# Altium PCB BH67F275&62_TEMP_EVM_V1.2.PcbDoc (part 2 of 2)
Units mil, origin at the board's own origin, x right, y up, seen from the top; angles counter-clockwise.
Board outline 4690.02 x 3082.03 mil, 2 copper layers (Top Layer, Bottom Layer); 69 components, 83 nets, 365 pads, 122 vias.
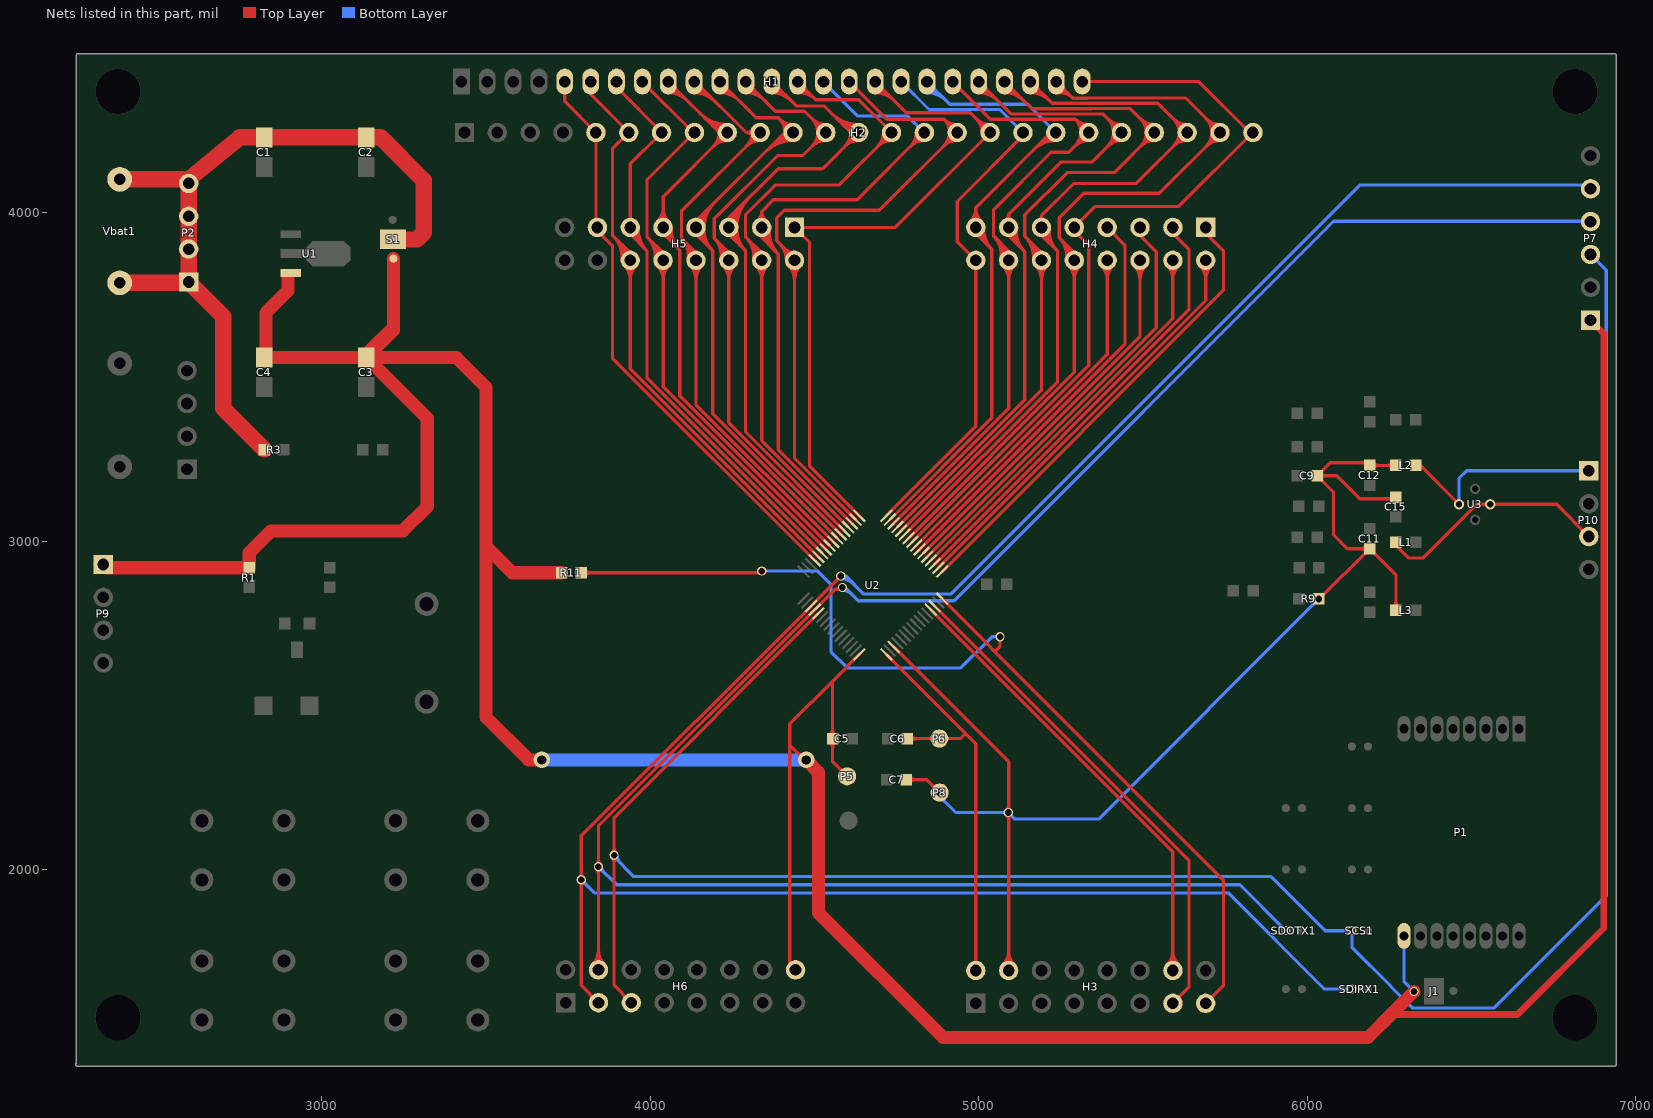
[diagram p2: the nets of this part, all layers, seen from the top]

## Via types
v1: diameter 28, hole 20, Top Layer to Bottom Layer, tented both sides, 64 vias
v2: diameter 28, hole 16, Top Layer to Bottom Layer, tented both sides, 56 vias
v3: diameter 50, hole 28, Top Layer to Bottom Layer, 2 vias

## Nets (pads, with @x,y where several pads share a name; then routed paths per layer and width w, separated by ;. In a path a pad name is that pad's centre, name@x,y a point inside that pad or via, vN(x,y) a via of type N, cw(c..) or ccw(c..) an arc to the next point about the centre after c; other vN are vias at no path point) (continued)
SCSB: H6.5 P7.3 SCS1.1 U2.53 | length 6918.2
  Top Layer w10: v1@3883.64,2038.64 cw(c3868.27,2023.27) 3890,2023.27 cw(c3911.73,2023.27) v1@3896.36,2038.64 ; v1@3883.64,2051.36 ccw(c3868.27,2066.73) 3890,2066.73 ccw(c3911.73,2066.73) v1@3896.36,2051.36 ; H6.5@3942.38,1596 3890,1648.37 v1(3890,2045) 3890,2158.86 U2.53@4512.06,2780.92
  Bottom Layer w10: v1(3890,2045) 3890,2040 3950,1980 5890,1980 6054.67,1815.33 v1(6136.05,1815.33) 6136.05,1765 6255,1646.05 6255,1645 6320,1580 6568.71,1580 6910,1921.29 6910,3826.06 P7.3@6862.36,3873.7 ; v1@3899,2045 ccw(c3932.8,2045) 3908.9,2021.1
"SDI RX": H6.3 P7.5 SDIRX1.1 U2.51 | length 7143.1
  Top Layer w10: v1@3783.64,1963.64 cw(c3768.27,1948.27) 3790,1948.27 cw(c3811.73,1948.27) v1@3796.36,1963.64 ; v1@3783.64,1976.36 ccw(c3768.27,1991.73) 3790,1991.73 ccw(c3811.73,1991.73) v1@3796.36,1976.36 ; H6.3@3842.38,1596 3790,1648.37 v1(3790,1970) 3790,2104.11 U2.51@4489.43,2803.54 ; U2.51@4494.12,2808.23 4579.94,2894.05 v1(4579.94,2895)
  Bottom Layer w10: v1@3790,1961 cw(c3790,1939.27) 3805.36,1954.64 cw(c3820.73,1970) v1@3799,1970 ; v1(3790,1970) 3830,1930 5760,1930 6052.59,1637.41 v1(6136.05,1637.41) ; v1@4579.94,2886 cw(c4579.94,2827.92) 4621.01,2868.99 ; v1(4579.94,2895) 4595,2895 ; v1@4579.94,2896 cw(c4579.94,2862.06) 4603.94,2886.06 ; v1@4587.87,2890.74 cw(c4595,2886.9) 4595,2895 ; v1@4587.87,2899.26 ccw(c4595,2903.1) 4595,2895 ; P7.5@6867.36,4085 6160,4085 4915,2840 4650,2840 4595,2895
"SDO TX": H6.4 P7.4 SDOTX1.1 U2.52 | length 6740
  Top Layer w10: H6.4@3825.03,1713.34 ccw(c3783.16,1755.21) 3842.38,1755.21 ccw(c3901.59,1755.21) H6.4@3859.72,1713.34 ; H6.4@3832.1,1706.27 ccw(c3807.3,1731.07) 3842.38,1731.07 ccw(c3877.45,1731.07) H6.4@3852.65,1706.27 ; v1@3836.01,2003.64 cw(c3820.65,1988.27) 3842.38,1988.27 cw(c3864.1,1988.27) v1@3848.74,2003.64 ; v1@3836.01,2016.36 ccw(c3820.65,2031.73) 3842.38,2031.73 ccw(c3864.1,2031.73) v1@3848.74,2016.36 ; H6.4@3842.38,1696 v1(3842.38,2010) 3842.38,2133.86 U2.52@4500.75,2792.23 4563.52,2855 ; v1@4576.77,2863.63 cw(c4563.52,2869.48) 4563.52,2855 ; v1(4585,2860) 4585,2855 4563.52,2855
  Bottom Layer w10: v1@3842.38,2001 cw(c3842.38,1979.27) 3857.74,1994.64 cw(c3873.1,2010) v1@3851.38,2010 ; v1(3842.38,2010) 3897.38,1955 5795.31,1955 v1(5934.97,1815.33) ; v1@4585,2851 cw(c4585,2810.48) 4613.65,2839.13 ; v1(4585,2860) 4592.78,2860 4632.78,2820 4925,2820 6080,3975 6852.36,3975 P7.4@6867.36,3990
SEG0: H1.5 H2.5 H5.13 U2.45 | length 1766.4
  Top Layer w10: H1.5@3739.96,4400 3739.96,4339.61 H2.5@3834.57,4245 H5.13@3834.57,3960.63 ; H5.13@3839.2,3956 3839.2,3945.8 3885,3900 3885,3557.88 U2.45@4500.75,2942.14
SEG1: H1.6 H2.6 H5.12 U2.44 | length 2122.1
  Top Layer w10: H1.6@3818.7,4400 3818.7,4360.87 H2.6@3934.57,4245 3885,4195.43 3885,3932.82 ; 3901.17,3916.66 cw(c3844.25,3859.74) H5.12@3924.68,3856.57 ; H5.12@3914.69,3856.97 ccw(c3813.14,3860.96) 3885,3932.82 ; 3917.33,3900.49 cw(c3875.35,3858.51) H5.12@3934.67,3856.18 ; H5.12@3921.85,3838.66 cw(c3879.98,3796.79) 3939.2,3796.79 cw(c3998.41,3796.79) H5.12@3956.54,3838.66 ; H5.12@3928.92,3845.73 cw(c3904.12,3820.93) 3939.2,3820.93 cw(c3974.27,3820.93) H5.12@3949.47,3845.73 ; U2.44@4512.06,2953.45 3939.2,3526.31 H5.12@3939.2,3856 3939.2,3878.63 3885,3932.82
SEG2: H1.7 H2.7 H5.11 U2.43 | length 1952.7
  Top Layer w10: H1.7@3897.44,4400 3897.44,4382.13 H2.7@4034.57,4245 3939.2,4149.63 H5.11@3939.2,3956 3939.2,3936 3990,3885.2 ; H5.11@3943.72,3955.73 ccw(c3994.59,3952.68) 3958.55,3916.65 ; H5.11@3953.7,3955.13 ccw(c4024.25,3950.9) 3974.27,3900.92 ; H5.11@3963.68,3954.53 ccw(c4053.92,3949.12) 3990,3885.2 ; U2.43@4523.37,2964.76 3990,3498.14 3990,3885.2
SEG3: H1.8 H2.8 H5.10 U2.42 | length 2107.7
  Top Layer w10: H1.8@3976.18,4400 4131.18,4245 H2.8@4134.57,4245 3990,4100.43 3990,3927.82 ; 4004.93,3912.89 cw(c3956.29,3864.25) H5.10@4024.74,3857.44 ; H5.10@4014.79,3858.43 ccw(c3929.14,3866.96) 3990,3927.82 ; 4019.86,3897.96 cw(c3983.45,3861.55) H5.10@4034.69,3856.45 ; H5.10@4021.85,3838.66 cw(c3979.98,3796.79) 4039.2,3796.79 cw(c4098.41,3796.79) H5.10@4056.54,3838.66 ; H5.10@4028.92,3845.73 cw(c4004.12,3820.93) 4039.2,3820.93 cw(c4074.27,3820.93) H5.10@4049.47,3845.73 ; U2.42@4534.69,2976.08 4039.2,3471.57 H5.10@4039.2,3856 4039.2,3878.63 3990,3927.82
SEG4: H1.9 H2.9 H5.9 U2.41 | length 2684.5
  Top Layer w10: H5.9@4021.85,3973.34 ccw(c3979.98,4015.21) 4039.2,4015.21 ccw(c4098.41,4015.21) H5.9@4056.54,3973.34 ; H5.9@4028.92,3966.27 ccw(c4004.12,3991.07) 4039.2,3991.07 ccw(c4074.27,3991.07) H5.9@4049.47,3966.27 ; H5.9@4039.2,3931.47 cw(c4039.2,3916.19) 4050,3927 ; H5.9@4043.72,3955.79 ccw(c4092.47,3953.55) 4057.96,3919.04 ; H5.9@4053.71,3955.33 ccw(c4123.09,3952.13) 4073.98,3903.02 ; H1.9@4054.92,4365.63 cw(c4054.92,4282.65) 4113.59,4341.33 ; H1.9@4054.92,4375.63 cw(c4054.92,4316.8) 4096.52,4358.4 ; H1.9@4054.92,4385.63 cw(c4054.92,4350.94) 4079.45,4375.47 ; H1.9@4054.92,4400 4209.92,4245 H2.9@4234.57,4245 4039.2,4049.63 H5.9@4039.2,3956 4039.2,3937.8 4090,3887 ; H5.9@4063.7,3954.87 ccw(c4153.72,3950.72) 4090,3887 ; H1.9@4075.51,4386.22 ccw(c4091.95,4386.22) 4080.33,4374.59 ; 4150.62,4304.3 ccw(c4234.57,4388.24) H2.9@4234.57,4269.53 ; 4167.69,4287.23 ccw(c4234.57,4354.1) H2.9@4234.57,4259.53 ; 4184.76,4270.16 ccw(c4234.57,4319.96) H2.9@4234.57,4249.53 ; 4201.84,4253.09 ccw(c4234.57,4285.82) H2.9@4234.57,4239.53 ; H2.9@4210.04,4245 cw(c4150.82,4245) 4192.7,4203.13 cw(c4234.57,4161.26) H2.9@4234.57,4220.47 ; H2.9@4220.04,4245 cw(c4184.97,4245) 4209.77,4220.2 cw(c4234.57,4195.4) H2.9@4234.57,4230.47 ; U2.41@4546,2987.39 4090,3443.39 4090,3887
SEG5: H1.10 H2.10 H5.8 U2.40 | length 2473
  Top Layer w10: 4108.7,3909.13 cw(c4067.68,3868.11) H5.8@4124.87,3858.43 ; H5.8@4115.01,3860.1 ccw(c4044.26,3872.08) 4095,3922.82 ; H5.8@4121.85,3838.66 cw(c4079.98,3796.79) 4139.2,3796.79 cw(c4198.41,3796.79) H5.8@4156.54,3838.66 ; 4122.4,3895.43 cw(c4091.11,3864.14) H5.8@4134.73,3856.76 ; H5.8@4128.92,3845.73 cw(c4104.12,3820.93) 4139.2,3820.93 cw(c4174.27,3820.93) H5.8@4149.47,3845.73 ; H1.10@4133.66,4365.63 cw(c4133.66,4274.88) 4197.83,4339.05 ; H1.10@4133.66,4375.63 cw(c4133.66,4309.02) 4180.76,4356.12 ; H1.10@4133.66,4385.63 cw(c4133.66,4343.16) 4163.69,4373.19 ; H1.10@4133.66,4400 4136.88,4400 4291.88,4245 ; H2.10@4310.04,4245 cw(c4250.82,4245) 4292.7,4203.13 cw(c4334.57,4161.26) H2.10@4334.57,4220.47 ; H2.10@4313.38,4232.65 ccw(c4291.88,4220.12) 4291.88,4245 ; H2.10@4313.38,4257.35 cw(c4291.88,4269.88) 4291.88,4245 ; H2.10@4320.04,4245 cw(c4284.97,4245) 4309.77,4220.2 cw(c4334.57,4195.4) H2.10@4334.57,4230.47 ; U2.40@4557.32,2998.7 4139.2,3416.82 H5.8@4139.2,3856 4139.2,3878.63 4095,3922.82 ; 4095,3922.82 4095,4005.43 H2.10@4334.57,4245 4291.88,4245
SEG6: H1.11 H2.11 H5.7 U2.39 | length 2771.6
  Top Layer w10: H5.7@4139.2,3980.53 ccw(c4139.2,3995.81) 4150,3985 ; H5.7@4143.72,3955.73 ccw(c4194.59,3952.68) 4158.55,3916.65 ; H5.7@4143.72,3956 cw(c4198.59,3956) 4159.79,3994.79 ; H5.7@4153.7,3955.13 ccw(c4224.25,3950.9) 4174.27,3900.92 ; H5.7@4153.72,3956 cw(c4232.73,3956) 4176.86,4011.86 ; H5.7@4163.68,3954.53 ccw(c4253.92,3949.12) 4190,3885.2 ; H5.7@4163.72,3956 cw(c4266.87,3956) 4193.94,4028.94 ; H1.11@4212.4,4365.63 cw(c4212.4,4282.65) 4271.07,4341.33 ; H1.11@4212.4,4375.63 cw(c4212.4,4316.8) 4254,4358.4 ; H1.11@4212.4,4385.63 cw(c4212.4,4350.94) 4236.93,4375.47 ; H1.11@4212.4,4400 4322.4,4290 4389.57,4290 H2.11@4434.57,4245 4410,4245 4139.2,3974.2 H5.7@4139.2,3956 4139.2,3936 4190,3885.2 ; H1.11@4232.99,4386.22 ccw(c4249.43,4386.22) 4237.81,4374.59 ; 4350.76,4185.76 cw(c4434.57,4101.95) H2.11@4434.57,4220.47 ; 4367.83,4202.83 cw(c4434.57,4136.09) H2.11@4434.57,4230.47 ; 4384.9,4219.9 cw(c4434.57,4170.23) H2.11@4434.57,4240.47 ; 4401.97,4236.97 cw(c4434.57,4204.37) H2.11@4434.57,4250.47 ; H2.11@4410.04,4245 ccw(c4350.82,4245) 4392.7,4286.87 ccw(c4434.57,4328.74) H2.11@4434.57,4269.53 ; H2.11@4420.04,4245 ccw(c4384.97,4245) 4409.77,4269.8 ccw(c4434.57,4294.6) H2.11@4434.57,4259.53 ; U2.39@4568.63,3010.02 4190,3388.65 4190,3885.2
SEG7: H1.12 H2.12 H5.6 U2.38 | length 2638.2
  Top Layer w10: 4208.7,3909.13 cw(c4167.68,3868.11) H5.6@4224.87,3858.43 ; H5.6@4215.01,3860.1 ccw(c4144.26,3872.08) 4195,3922.82 ; H5.6@4221.85,3838.66 cw(c4179.98,3796.79) 4239.2,3796.79 cw(c4298.41,3796.79) H5.6@4256.54,3838.66 ; 4222.4,3895.43 cw(c4191.11,3864.14) H5.6@4234.73,3856.76 ; H5.6@4228.92,3845.73 cw(c4204.12,3820.93) 4239.2,3820.93 cw(c4274.27,3820.93) H5.6@4249.47,3845.73 ; H1.12@4291.14,4365.63 cw(c4291.14,4282.65) 4349.81,4341.33 ; H1.12@4291.14,4375.63 cw(c4291.14,4316.8) 4332.74,4358.4 ; H1.12@4291.14,4385.63 cw(c4291.14,4350.94) 4315.67,4375.47 ; H1.12@4291.14,4400 4381.14,4310 4469.57,4310 H2.12@4534.57,4245 4464.57,4175 4387.52,4175 4195,3982.48 4195,3922.82 ; H1.12@4311.73,4386.22 ccw(c4328.17,4386.22) 4316.55,4374.59 ; H2.12@4534.57,4220.47 ccw(c4534.57,4161.26) 4492.7,4203.13 ccw(c4450.82,4245) 4510.04,4245 ccw(c4450.82,4245) 4492.7,4286.87 ccw(c4534.57,4328.74) H2.12@4534.57,4269.53 ; H2.12@4534.57,4230.47 ccw(c4534.57,4195.4) 4509.77,4220.2 ccw(c4484.97,4245) 4520.04,4245 ccw(c4484.97,4245) 4509.77,4269.8 ccw(c4534.57,4294.6) H2.12@4534.57,4259.53 ; U2.38@4579.94,3021.33 4239.2,3362.08 H5.6@4239.2,3856 4239.2,3878.63 4195,3922.82
SEG8: H1.13 H2.13 H5.5 U2.37 | length 2960.5
  Top Layer w10: H5.5@4233.72,3956 cw(c4290.53,3956) 4250.36,3996.16 ; H5.5@4243.72,3955.72 ccw(c4294.81,3952.58) 4258.61,3916.39 ; H5.5@4243.72,3956 cw(c4324.67,3956) 4267.43,4013.23 ; H5.5@4253.7,3955.11 ccw(c4324.38,3950.77) 4274.31,3900.69 ; H5.5@4253.72,3956 cw(c4358.81,3956) 4284.5,4030.31 ; H5.5@4263.68,3954.5 ccw(c4353.95,3948.95) 4290,3885 ; H5.5@4263.72,3956 cw(c4392.95,3956) 4301.57,4047.38 ; H1.13@4369.88,4365.63 cw(c4369.88,4282.65) 4428.55,4341.33 ; H1.13@4369.88,4375.63 cw(c4369.88,4316.8) 4411.48,4358.4 ; H1.13@4369.88,4385.63 cw(c4369.88,4350.94) 4394.41,4375.47 ; H1.13@4369.88,4400 4443.88,4326 4529,4326 4610,4245 H2.13@4634.57,4245 4524.57,4135 4389.2,4135 4239.2,3985 H5.5@4239.2,3956 4239.2,3935.8 4290,3885 ; H1.13@4390.47,4386.22 ccw(c4406.91,4386.22) 4395.29,4374.59 ; 4550.76,4304.24 ccw(c4634.57,4388.05) H2.13@4634.57,4269.53 ; 4567.83,4287.17 ccw(c4634.57,4353.91) H2.13@4634.57,4259.53 ; 4584.9,4270.1 ccw(c4634.57,4319.77) H2.13@4634.57,4249.53 ; U2.37@4591.26,3032.65 4290,3333.9 4290,3885 ; 4601.97,4253.03 ccw(c4634.57,4285.63) H2.13@4634.57,4239.53 ; H2.13@4610.04,4245 cw(c4550.82,4245) 4592.7,4203.13 cw(c4634.57,4161.26) H2.13@4634.57,4220.47 ; H2.13@4620.04,4245 cw(c4584.97,4245) 4609.77,4220.2 cw(c4634.57,4195.4) H2.13@4634.57,4230.47
SEG9: H1.14 H2.14 H5.4 U2.36 | length 2572.4
  Top Layer w10: 4304.93,3912.89 cw(c4256.29,3864.25) H5.4@4324.74,3857.44 ; H5.4@4314.79,3858.43 ccw(c4229.14,3866.96) 4290,3927.82 ; 4319.86,3897.96 cw(c4283.45,3861.55) H5.4@4334.69,3856.45 ; H5.4@4321.85,3838.66 cw(c4279.98,3796.79) 4339.2,3796.79 cw(c4398.41,3796.79) H5.4@4356.54,3838.66 ; H5.4@4328.92,3845.73 cw(c4304.12,3820.93) 4339.2,3820.93 cw(c4374.27,3820.93) H5.4@4349.47,3845.73 ; H1.14@4448.62,4400 4503.62,4345 ; H1.14@4449.19,4375.65 cw(c4451.9,4325) 4487.76,4360.86 ; H1.14@4449.72,4365.66 cw(c4453.51,4294.89) 4503.62,4345 ; H1.14@4469.21,4386.22 ccw(c4485.66,4386.22) 4474.03,4374.59 ; U2.36@4602.57,3043.96 4339.2,3307.33 H5.4@4339.2,3856 4339.2,3878.63 4290,3927.82 ; H2.14@4710.04,4245 cw(c4650.82,4245) 4692.7,4203.13 cw(c4734.57,4161.26) H2.14@4734.57,4220.47 ; H2.14@4720.04,4245 cw(c4684.97,4245) 4709.77,4220.2 cw(c4734.57,4195.4) H2.14@4734.57,4230.47 ; 4290,3927.82 4290,3995 4380,4085 4574.57,4085 H2.14@4734.57,4245 4634.57,4345 4503.62,4345
SEG10: H1.15 H2.15 H5.3 U2.35 | length 2515.4
  Top Layer w10: H5.3@4324.76,3975.83 ccw(c4304.11,4004.2) 4339.2,4004.2 ; H5.3@4333.77,3956.71 ccw(c4379.56,3950.74) 4346.91,3918.09 ; H5.3@4334.17,3931.99 cw(c4332.87,3925.8) 4339.2,3925.8 ; H5.3@4343.69,3955.42 ccw(c4404.97,3947.43) 4361.27,3903.73 ; H5.3@4344.23,3931.99 ccw(c4345.52,3925.8) 4339.2,3925.8 ; H5.3@4353.6,3954.12 ccw(c4430.39,3944.12) 4375.63,3889.37 ; H5.3@4353.63,3975.83 cw(c4374.28,4004.2) 4339.2,4004.2 ; H5.3@4363.52,3952.83 ccw(c4455.8,3940.81) 4390,3875 ; U2.35@4613.88,3055.27 4390,3279.16 4390,3875 ; H2.15@4810.04,4245 cw(c4750.82,4245) 4792.7,4203.13 cw(c4834.57,4161.26) H2.15@4834.57,4220.47 ; H2.15@4820.04,4245 cw(c4784.97,4245) 4809.77,4220.2 cw(c4834.57,4195.4) H2.15@4834.57,4230.47 ; H2.15@4834.57,4245 4629.57,4040 4375,4040 4339.2,4004.2 ; 4339.2,3925.8 H5.3@4339.2,3956 4339.2,4004.2 ; 4339.2,3925.8 4390,3875
  Bottom Layer w10: H1.15@4527.36,4400 4632.36,4295 4784.57,4295 H2.15@4834.57,4245
SEG11: H1.16 H2.16 H5.2 U2.34 | length 2631.7
  Top Layer w10: 4393.93,3906.07 cw(c4343.86,3856) H5.2@4414.67,3856 ; 4405.52,3894.48 ccw(c4439.2,3928.15) H5.2@4439.2,3880.53 ; 4411,3889 cw(c4378,3856) H5.2@4424.67,3856 ; H5.2@4421.85,3838.66 cw(c4379.98,3796.79) 4439.2,3796.79 cw(c4498.41,3796.79) H5.2@4456.54,3838.66 ; H5.2@4428.92,3845.73 cw(c4404.12,3820.93) 4439.2,3820.93 cw(c4474.27,3820.93) H5.2@4449.47,3845.73 ; H1.16@4606.1,4400 4720.57,4285.53 4851.35,4285.53 4851.88,4285 4894.57,4285 ; U2.34@4625.2,3066.59 4439.2,3252.59 H5.2@4439.2,3856 4439.2,3860.8 4385,3915 4385,3985 4407.92,4007.92 4697.49,4007.92 H2.16@4934.57,4245 4894.57,4285 ; H2.16@4910.04,4245 cw(c4850.82,4245) 4892.7,4203.13 cw(c4934.57,4161.26) H2.16@4934.57,4220.47 ; H2.16@4910.05,4245.81 ccw(c4857.12,4247.55) 4894.57,4285 ; H2.16@4920.04,4245 cw(c4884.97,4245) 4909.77,4220.2 cw(c4934.57,4195.4) H2.16@4934.57,4230.47 ; H2.16@4920.05,4245.48 ccw(c4888.69,4246.51) 4910.88,4268.69 ccw(c4933.06,4290.87) H2.16@4934.09,4259.52 ; H2.16@4933.76,4269.51 cw(c4932.02,4322.45) 4894.57,4285
SEG12: H1.17 H2.17 H5.1 U2.33 | length 2388.5
  Top Layer w10: U2.33@4636.51,3077.9 4485,3229.41 4485,3910.2 H5.1@4439.2,3956 4745.57,3956 H2.17@5034.57,4245 4974.57,4305 4779.84,4305 H1.17@4684.84,4400 ; H1.17@4684.84,4365.63 cw(c4684.84,4282.65) 4743.52,4341.33 ; H1.17@4684.84,4375.63 cw(c4684.84,4316.8) 4726.44,4358.4 ; H1.17@4684.84,4385.63 cw(c4684.84,4350.94) 4709.37,4375.47 ; H1.17@4705.43,4386.22 ccw(c4721.88,4386.22) 4710.25,4374.59 ; H2.17@5010.04,4245 ccw(c4950.82,4245) 4992.7,4286.87 ccw(c5034.57,4328.74) H2.17@5034.57,4269.53 ; H2.17@5020.04,4245 ccw(c4984.97,4245) 5009.77,4269.8 ccw(c5034.57,4294.6) H2.17@5034.57,4259.53
SEG13: H1.18 H2.18 H4.16 U2.32 | length 1821
  Top Layer w10: U2.32@4718.54,3077.9 4991,3350.36 H4.16@4991,3856 4935,3912 4935,4035 5134.57,4234.57 H2.18@5134.57,4245
  Bottom Layer w10: H1.18@4763.58,4400 4848.58,4315 5064.57,4315 H2.18@5134.57,4245
SEG14: H1.19 H2.19 H4.15 U2.31 | length 2556.6
  Top Layer w10: U2.31@4729.85,3066.59 5040,3376.74 5040,3890 ; H4.15@4973.66,3973.34 ccw(c4931.79,4015.21) 4991,4015.21 ccw(c5050.21,4015.21) H4.15@5008.34,3973.34 ; H4.15@4980.73,3966.27 ccw(c4955.93,3991.07) 4991,3991.07 ccw(c5026.07,3991.07) H4.15@5001.27,3966.27 ; H4.15@4991,3931.47 cw(c4991,3913.3) 5003.85,3926.15 ; H4.15@4995.52,3955.73 ccw(c5040.14,3953.08) 5008.53,3921.47 ; H4.15@5005.5,3955.14 ccw(c5069.84,3951.31) 5024.26,3905.74 ; H4.15@5015.48,3954.54 ccw(c5099.53,3949.54) 5040,3890 ; 5167.09,4192.52 cw(c5234.57,4125.04) H2.19@5234.57,4220.47 ; 5184.16,4209.59 cw(c5234.57,4159.19) H2.19@5234.57,4230.47 ; 5201.23,4226.66 cw(c5234.57,4193.33) H2.19@5234.57,4240.47 ; 5203.3,4228.74 ccw(c5187.04,4245) H2.19@5210.04,4245 ; H2.19@5234.57,4245 5219.57,4245 4991,4016.43 H4.15@4991,3956 4991,3939 5040,3890
  Bottom Layer w10: H1.19@4842.32,4365.63 cw(c4842.32,4282.65) 4901,4341.33 ; H1.19@4842.32,4375.63 cw(c4842.32,4316.8) 4883.92,4358.4 ; H1.19@4842.32,4385.63 cw(c4842.32,4350.94) 4866.85,4375.47 ; H1.19@4842.32,4400 4911.32,4331 5148.57,4331 H2.19@5234.57,4245 ; H1.19@4862.91,4386.22 ccw(c4879.36,4386.22) 4867.73,4374.59
SEG15: H1.20 H2.20 H4.14 U2.30 | length 2647.6
  Top Layer w10: U2.30@4741.16,3055.27 5091,3405.11 H4.14@5091,3856 5091,3884 5045,3930 ; H1.20@4921.06,4400 5035.43,4285.63 5293.94,4285.63 ; 5058.54,3916.46 cw(c5012.21,3870.13) H4.14@5076.7,3858.56 ; H4.14@5066.86,3860.33 ccw(c4989.25,3874.25) 5045,3930 ; 5072.07,3902.93 cw(c5035.16,3866.01) H4.14@5086.54,3856.8 ; H4.14@5073.66,3838.66 cw(c5031.79,3796.79) 5091,3796.79 cw(c5150.21,3796.79) H4.14@5108.34,3838.66 ; H4.14@5080.73,3845.73 cw(c5055.93,3820.93) 5091,3820.93 cw(c5126.07,3820.93) H4.14@5101.27,3845.73 ; 5085.61,3889.39 cw(c5058.11,3861.9) H4.14@5096.39,3855.03 ; H2.20@5310.04,4245 cw(c5250.82,4245) 5292.7,4203.13 cw(c5334.57,4161.26) H2.20@5334.57,4220.47 ; H2.20@5310.05,4245.53 ccw(c5255.02,4246.71) 5293.94,4285.63 ; H2.20@5320.04,4245 cw(c5284.97,4245) 5309.77,4220.2 cw(c5334.57,4195.4) H2.20@5334.57,4230.47 ; H2.20@5320.04,4245.31 ccw(c5287.45,4246.01) 5310.5,4269.06 ccw(c5333.55,4292.11) H2.20@5334.25,4259.52 ; H2.20@5334.04,4269.52 cw(c5332.85,4324.54) 5293.94,4285.63 ; 5045,3930 5045,4010 5220,4185 5274.57,4185 H2.20@5334.57,4245 5293.94,4285.63
SEG16: H1.21 H2.21 H4.13 U2.29 | length 2794.6
  Top Layer w10: U2.29@4752.48,3043.96 5140,3431.48 5140,3882 ; H1.21@4999.8,4365.63 cw(c4999.8,4282.65) 5058.48,4341.33 ; H1.21@4999.8,4375.63 cw(c4999.8,4316.8) 5041.4,4358.4 ; H1.21@4999.8,4385.63 cw(c4999.8,4350.94) 5024.33,4375.47 ; H1.21@4999.8,4400 5098.17,4301.63 5377.94,4301.63 H2.21@5434.57,4245 5344.57,4155 5250,4155 5091,3996 ; H1.21@5020.39,4386.22 ccw(c5036.84,4386.22) 5025.21,4374.59 ; H4.13@5079.88,3977.86 ccw(c5070.65,3996) 5091,3996 ; H4.13@5085.57,3956.65 ccw(c5122.79,3952.22) 5096.28,3925.72 ; H4.13@5095.5,3955.47 ccw(c5148.84,3949.13) 5110.86,3911.14 ; H4.13@5102.12,3977.86 cw(c5111.35,3996) 5091,3996 ; H4.13@5105.43,3954.29 ccw(c5174.89,3946.04) 5125.43,3896.57 ; H4.13@5115.36,3953.11 ccw(c5200.94,3942.94) 5140,3882 ; H2.21@5434.57,4220.47 ccw(c5434.57,4161.26) 5392.7,4203.13 ccw(c5350.82,4245) 5410.04,4245 ccw(c5350.82,4245) 5392.7,4286.87 ccw(c5434.57,4328.74) H2.21@5434.57,4269.53 ; H2.21@5434.57,4230.47 ccw(c5434.57,4195.4) 5409.77,4220.2 ccw(c5384.97,4245) 5420.04,4245 ccw(c5384.97,4245) 5409.77,4269.8 ccw(c5434.57,4294.6) H2.21@5434.57,4259.53 ; 5091,3996 H4.13@5091,3956 5091,3931 5140,3882
SEG17: H1.22 H2.22 H4.12 U2.28 | length 2962.9
  Top Layer w10: U2.28@4763.79,3032.65 5191,3459.85 H4.12@5191,3856 5191,3878.63 5140,3929.63 5140,3993.98 5269.02,4123 5412.57,4123 H2.22@5534.57,4245 5461.57,4318 5343.54,4318 5343.17,4317.63 5160.91,4317.63 H1.22@5078.54,4400 ; H1.22@5078.54,4365.63 cw(c5078.54,4282.65) 5137.22,4341.33 ; H1.22@5078.54,4375.63 cw(c5078.54,4316.8) 5120.14,4358.4 ; H1.22@5078.54,4385.63 cw(c5078.54,4350.94) 5103.07,4375.47 ; H1.22@5099.13,4386.22 ccw(c5115.58,4386.22) 5103.95,4374.59 ; 5140,3929.62 cw(c5075.27,3864.9) H4.12@5166.54,3857.88 ; 5155.38,3914.25 cw(c5103.83,3862.7) H4.12@5176.52,3857.11 ; 5170.75,3898.87 cw(c5132.38,3860.51) H4.12@5186.49,3856.35 ; H4.12@5173.66,3838.66 cw(c5131.79,3796.79) 5191,3796.79 cw(c5250.21,3796.79) H4.12@5208.34,3838.66 ; H4.12@5180.73,3845.73 cw(c5155.93,3820.93) 5191,3820.93 cw(c5226.07,3820.93) H4.12@5201.27,3845.73 ; H2.22@5534.57,4220.47 ccw(c5534.57,4161.26) 5492.7,4203.13 ccw(c5450.82,4245) 5510.04,4245 ccw(c5450.82,4245) 5492.7,4286.87 ccw(c5534.57,4328.74) H2.22@5534.57,4269.53 ; H2.22@5534.57,4230.47 ccw(c5534.57,4195.4) 5509.77,4220.2 ccw(c5484.97,4245) 5520.04,4245 ccw(c5484.97,4245) 5509.77,4269.8 ccw(c5534.57,4294.6) H2.22@5534.57,4259.53
SEG18: H1.23 H2.23 H4.11 U2.27 | length 2923
  Top Layer w10: U2.27@4784.39,3030.61 5240,3486.23 5240,3883.65 ; H1.23@5157.28,4365.63 cw(c5157.28,4282.65) 5215.96,4341.33 ; H1.23@5157.28,4375.63 cw(c5157.28,4316.8) 5198.88,4358.4 ; H1.23@5157.28,4385.63 cw(c5157.28,4350.94) 5181.81,4375.47 ; H1.23@5157.28,4400 5223.65,4333.63 5336.55,4333.63 5336.92,4334 5545.57,4334 H2.23@5634.57,4245 5479.57,4090 5290,4090 5191,3991 ; H1.23@5177.87,4386.22 ccw(c5194.32,4386.22) 5182.69,4374.59 ; H4.11@5182.63,3979.06 ccw(c5178.29,3991) 5191,3991 ; H4.11@5195.5,3955.52 ccw(c5247.18,3949.98) 5210.43,3913.22 ; H4.11@5199.37,3979.06 cw(c5203.71,3991) 5191,3991 ; H4.11@5205.44,3954.45 ccw(c5273.88,3947.11) 5225.21,3898.44 ; H4.11@5215.39,3953.38 ccw(c5300.59,3944.25) 5240,3883.66 ; H2.23@5634.57,4220.47 ccw(c5634.57,4161.26) 5592.7,4203.13 ccw(c5550.82,4245) 5610.04,4245 ccw(c5550.82,4245) 5592.7,4286.87 ccw(c5634.57,4328.74) H2.23@5634.57,4269.53 ; H2.23@5634.57,4230.47 ccw(c5634.57,4195.4) 5609.77,4220.2 ccw(c5584.97,4245) 5620.04,4245 ccw(c5584.97,4245) 5609.77,4269.8 ccw(c5634.57,4294.6) H2.23@5634.57,4259.53 ; 5191,3991 H4.11@5191,3956 5191,3932.65 5240,3883.65
SEG19: H1.24 H2.24 H4.10 U2.26 | length 3083.7
  Top Layer w10: U2.26@4786.42,3010.02 5291,3514.6 H4.10@5291,3856 5291,3879 5245,3925 ; H1.24@5236.02,4400 5286.39,4349.63 ; H1.24@5237.41,4375.72 cw(c5242.82,4334.73) 5272.06,4363.97 ; H1.24@5238.72,4365.81 cw(c5246.16,4309.4) 5286.39,4349.63 ; H1.24@5256.61,4386.22 ccw(c5273.06,4386.22) 5261.43,4374.59 ; 5259.1,3910.9 cw(c5215.22,3867.03) H4.10@5276.62,3858.09 ; H4.10@5266.73,3859.53 ccw(c5190.62,3870.61) 5245,3925 ; 5273.19,3896.81 cw(c5239.83,3863.45) H4.10@5286.52,3856.65 ; H4.10@5273.66,3838.66 cw(c5231.79,3796.79) 5291,3796.79 cw(c5350.21,3796.79) H4.10@5308.34,3838.66 ; H4.10@5280.73,3845.73 cw(c5255.93,3820.93) 5291,3820.93 cw(c5326.07,3820.93) H4.10@5301.27,3845.73 ; H2.24@5734.57,4220.47 ccw(c5734.57,4161.26) 5692.7,4203.13 ccw(c5650.82,4245) 5710.04,4245 ccw(c5650.82,4245) 5692.7,4286.87 ccw(c5734.57,4328.74) H2.24@5734.57,4269.53 ; H2.24@5734.57,4230.47 ccw(c5734.57,4195.4) 5709.77,4220.2 ccw(c5684.97,4245) 5720.04,4245 ccw(c5684.97,4245) 5709.77,4269.8 ccw(c5734.57,4294.6) H2.24@5734.57,4259.53 ; 5245,3925 5245,3985 5320,4060 5549.57,4060 H2.24@5734.57,4245 5629.57,4350 5330.29,4350 5329.92,4349.63 5286.39,4349.63
SEG20: H1.25 H2.25 H4.9 U2.25 | length 2445.3
  Top Layer w10: U2.25@4797.73,2998.7 5335,3535.97 5335,3902 5291,3946 H4.9@5291,3956 5355,4020 5609.57,4020 H2.25@5834.57,4245 5825,4245 5670,4400 H1.25@5314.76,4400
SEG21: H4.8 U2.24 | length 1257.8
  Top Layer w10: U2.24@4809.05,2987.39 5391,3569.35 H4.8@5391,3856 ; H4.8@5373.66,3838.66 cw(c5331.79,3796.79) 5391,3796.79 cw(c5450.21,3796.79) H4.8@5408.34,3838.66 ; H4.8@5380.73,3845.73 cw(c5355.93,3820.93) 5391,3820.93 cw(c5426.07,3820.93) H4.8@5401.27,3845.73
SEG22: H4.7 U2.23 | length 1261
  Top Layer w10: U2.23@4820.36,2976.08 5445,3600.72 5445,3902 H4.7@5391,3956
SEG23: H4.6 U2.22 | length 1312.4
  Top Layer w10: U2.22@4831.67,2964.76 5491,3624.09 H4.6@5491,3856 ; H4.6@5473.66,3838.66 cw(c5431.79,3796.79) 5491,3796.79 cw(c5550.21,3796.79) H4.6@5508.34,3838.66 ; H4.6@5480.73,3845.73 cw(c5455.93,3820.93) 5491,3820.93 cw(c5526.07,3820.93) H4.6@5501.27,3845.73
SEG24: H4.5 U2.21 | length 1311.6
  Top Layer w10: U2.21@4842.99,2953.45 5540,3650.46 5540,3882 5491,3931 H4.5@5491,3956
SEG25: H4.4 U2.20 | length 1367.1
  Top Layer w10: U2.20@4854.3,2942.14 5591,3678.84 H4.4@5591,3856 ; H4.4@5573.66,3838.66 cw(c5531.79,3796.79) 5591,3796.79 cw(c5650.21,3796.79) H4.4@5608.34,3838.66 ; H4.4@5580.73,3845.73 cw(c5555.93,3820.93) 5591,3820.93 cw(c5626.07,3820.93) H4.4@5601.27,3845.73
SEG26: H4.3 U2.19 | length 1366.2
  Top Layer w10: U2.19@4865.61,2930.82 5640,3705.21 5640,3890 5591,3939 H4.3@5591,3956
SEG27: H4.2 U2.18 | length 1421.8
  Top Layer w10: U2.18@4876.93,2919.51 5691,3733.58 H4.2@5691,3856 ; H4.2@5673.66,3838.66 cw(c5631.79,3796.79) 5691,3796.79 cw(c5750.21,3796.79) H4.2@5708.34,3838.66 ; H4.2@5680.73,3845.73 cw(c5655.93,3820.93) 5691,3820.93 cw(c5726.07,3820.93) H4.2@5701.27,3845.73
SEG28: H4.1 U2.17 | length 1425.1
  Top Layer w10: U2.17@4888.24,2908.19 5745,3764.95 5745,3885 5691,3939 H4.1@5691,3956
SEG29: H3.16 R11.2 U2.16 | length 3265.8
  Top Layer w10: R11.2@3790,2905 4334.2,2905 v1(4339.2,2910) ; R11.2@3798.84,2896.16 cw(c3820.18,2874.82) 3820.18,2905 cw(c3820.18,2935.18) R11.2@3798.84,2913.84 ; U2.16@4888.24,2826.17 5024.01,2690.41 ; 5024.41,2690 5049.41,2665 ; v1(5065,2710) 5065,2680.59 5049.41,2665 ; H3.16@5691,1594 5745,1648 5745,1969.41 5049.41,2665
  Bottom Layer w10: v1@4340,2910 4510.36,2910 4550,2870.36 4550,2665 4600,2615 4945.65,2615 5040.65,2710 v1(5065,2710)
SEG30: H3.14 U2.14 | length 1550.6
  Top Layer w10: U2.14@4865.61,2803.54 5640,2029.16 5640,1643 H3.14@5591,1594
SEG31: H3.13 U2.13 | length 1551.5
  Top Layer w10: U2.13@4854.3,2792.23 5591,2055.53 H3.13@5591,1694 ; H3.13@5573.66,1711.34 ccw(c5531.79,1753.21) 5591,1753.21 ccw(c5650.21,1753.21) H3.13@5608.34,1711.34 ; H3.13@5580.73,1704.27 ccw(c5555.93,1729.07) 5591,1729.07 ccw(c5626.07,1729.07) H3.13@5601.27,1704.27
VBAT: C1.2 C2.1 P2.1 P2.2 P2.3 P2.4 R3.1 S1.2@3217.01,3920 Vbat1.1 Vbat1.2 | length 2405.1
  Top Layer w10: S1.2@3220,3910.2 S1.2@3229.16,3919.36
  Top Layer w50: Vbat1.1@2385,3787.52 P2.1@2597.48,3787.52 ; Vbat1.2@2385,4102.48 2595,4102.48 2750,4230 C1.2@2825,4230 C2.1@3135,4230 3180,4230 3310,4100 3310,3939.31 3290.06,3919.36 S1.2@3229.16,3919.36 ; P2.4@2595,4090 P2.3@2595,3990 P2.2@2595,3890 P2.1@2595,3790 P2.1@2597.48,3787.52 ; R3.1@2825,3280 2700,3405 2700,3685 P2.1@2597.48,3787.52
VCM: C7.2 C9.1 C11.1 C12.1 C15.1 H3.3 L2.2 L3.2 P8.1 R9.1 U2.3 | length 4631.2
  Top Layer w10: U2.3@4741.16,2679.09 5091,2329.25 v1@5091,2175 ; C7.2@4780,2275 4830,2275 4841.65,2275 P8.1@4881.14,2235.51 ; C7.2@4788.84,2266.16 cw(c4810.18,2244.82) 4810.18,2275 cw(c4810.18,2305.18) C7.2@4788.84,2283.84 ; P8.1@4863.47,2253.18 cw(c4845.29,2235) P8.1@4871,2235 ; P8.1@4867.45,2249.2 ccw(c4880,2261.74) P8.1@4880,2244 ; P8.1@4879.49,2235.51 v1(4880,2235) ; H3.3@5073.66,1711.34 ccw(c5031.79,1753.21) 5091,1753.21 ccw(c5150.21,1753.21) H3.3@5108.34,1711.34 ; H3.3@5080.73,1704.27 ccw(c5055.93,1729.07) 5091,1729.07 ccw(c5126.07,1729.07) H3.3@5101.27,1704.27 ; v1@5083.64,2168.64 cw(c5065.86,2150.86) 5091,2150.86 ; v1@5083.64,2181.36 ccw(c5065.86,2199.14) 5091,2199.14 ; H3.3@5085,1700 H3.3@5091,1694 5091,2135 ; v1(5090,2175) 5091,2174 5091,2136 ; 5091,2155.69 cw(c5109.31,2155.69) v1@5096.36,2168.64 ; 5091,2194.31 ccw(c5109.31,2194.31) v1@5096.36,2181.36 ; v1(6035,2825) 6036.76,2825 C11.1@6190,2978.24 ; R9.1@6035,2834 ccw(c6035,2859.98) 6053.37,2841.61 ; C9.1@6038.84,3191.16 cw(c6060.18,3169.82) 6060.18,3200 cw(c6060.18,3230.18) C9.1@6038.84,3208.84 ; R9.1@6044,2825 cw(c6061.47,2825) R9.1@6049.12,2837.36 ; C11.1@6181.16,2969.4 ccw(c6159.82,2948.06) 6159.82,2978.24 ccw(c6159.82,3008.42) C11.1@6181.16,2987.08 ; C12.1@6181.62,3240 6070,3240 C9.1@6030,3200 ; C12.1@6190,3231.62 L2.2@6270,3231.62 ; C12.1@6198.84,3222.78 cw(c6220.18,3201.44) 6220.18,3231.62 cw(c6220.18,3261.8) C12.1@6198.84,3240.46 ; L3.2@6261.16,2798.84 ccw(c6239.82,2820.18) 6270,2820.18 ccw(c6300.18,2820.18) L3.2@6278.84,2798.84 ; L2.2@6261.16,3222.78 ccw(c6239.82,3201.44) 6239.82,3231.62 ccw(c6239.82,3261.8) L2.2@6261.16,3240.46 ; L3.2@6270,2790 6270,2898.24 C11.1@6190,2978.24 ; C15.1@6270,3135 6265,3130 6160,3130 6090,3200 C9.1@6030,3200 ; C9.1@6030,3200 6080,3150 6080,3020 6121.76,2978.24 C11.1@6190,2978.24
  Bottom Layer w10: v1(4880,2235) 4871.65,2235 4871.14,2235.51 4871.14,2233.86 4930,2175 v1(5090,2175) 5110,2155 5365,2155 v1(6035,2825) ; v1@6026,2825 cw(c6004.27,2825) 6019.64,2809.64 cw(c6035,2794.27) v1@6035,2816
VDD: C3.1 C4.2 C5.2 H6.16 J1.3 P1.9 P5.1 P7.1 P9.1 R1.2 R11.1 S1.3 U1.3 U2.64 | length 12162.9
  Top Layer w10: H6.16@4442.38,1696 4425,1713.37 4425,2380 ; v3(4475,2335) 4470,2335 4425,2380 ; C5.2@4546.16,2391.16 cw(c4524.82,2369.82) 4555,2369.82 cw(c4585.18,2369.82) C5.2@4563.84,2391.16 ; C5.2@4546.16,2408.84 ccw(c4524.82,2430.18) 4555,2430.18 ccw(c4585.18,2430.18) C5.2@4563.84,2408.84 ; P5.1@4599.28,2285 4555,2329.28 C5.2@4555,2400 4555,2574.95 ; U2.64@4636.51,2656.46 4555,2574.95 ; 4425,2380 4425,2444.95 4555,2574.95
  Top Layer w20: 6265,1570 6275,1560 6640,1560 6902.89,1822.89 6902.89,3633.17 P7.1@6862.36,3673.7
  Top Layer w40: P9.1@2325,2930 P9.1@2330,2925 ; P9.1@2335,2930 2345,2920 2405,2920 R1.2@2779.29,2920 2779.29,2965.62 2845.68,3032.01 3247.01,3032.01 3321.3,3106.3 3321.3,3375 3186,3510.3 3186,3510.87 3136.77,3560.1 3409.9,3560.1 3500,3470 3500,2985 ; C4.2@2825,3560 3134.9,3560 C3.1@3135,3560.1 3218.01,3643.12 3218.01,3651.24 ; C4.2@2830,3585 2830,3695.75 2897.13,3762.87 U1.3@2897.13,3808.24 ; C3.1@3146.77,3580 3218.01,3651.24 ; S1.3@3218.01,3861 3218.01,3651.24 ; v3(3670,2335) 3629.57,2335 3500,2464.57 3500,2915 3500,2985 ; R11.1@3730,2905 3580,2905 3500,2985 ; v3(4475,2335) 4512.06,2297.94 4512.06,1869.94 4892,1490 6185,1490 6265,1570 v1(6325,1630)
  Bottom Layer w10: P1.9@6294.41,1799.41 6294.41,1660.59 v1(6325,1630)
  Bottom Layer w40: v3(3670,2335) v3(4475,2335)
VOREG: C6.1 H3.1 P6.1 U2.1 | length 1296.9
  Top Layer w10: U2.1@4718.54,2656.46 4991,2384 H3.1@4991,1694 ; C6.1@4782.71,2400 4871.73,2400 P6.1@4875.87,2404.13 ; C6.1@4791.55,2391.16 cw(c4812.89,2369.82) 4812.89,2400 cw(c4812.89,2430.18) C6.1@4791.55,2408.84 ; P6.1@4880,2400 4944.49,2400 4955,2410.51
VTP+: L1.1 P10.3 U3.1 | length 711.3
  Top Layer w10: L1.1@6270,2988.24 6308.24,2950 6353.41,2950 6516.41,3113 U3.1@6557,3113 6759.36,3113 P10.3@6857.36,3015
VTP-: L2.1 P10.1 U3.3 | length 672.7
  Top Layer w10: L2.1@6330,3231.62 6343.38,3231.62 U3.3@6462,3113
  Bottom Layer w10: U3.3@6462,3113 6462,3192 6485,3215 P10.1@6857.36,3215 P10.1@6865,3215
pads on no net: INT_EX1.2@6161.05,2001.75 J1.2@6386,1631 P1.7 P1.8 P1.11 PDN1.2@6161.05,2375.96 RST_N1.2@5959.97,2188.17 S1.2@3217.01,3920 SCK1.2@5959.97,2001.75 SCS1.2@6161.05,1815.33 SDIRX1.2@6161.05,1637.41 SDOTX1.2@5959.97,1815.33 STATE1.2@6161.05,2188.17 WAKE1.2@5959.97,1637.41

## Polygon pours and split planes (outlines as drawn)
GND on Top Layer "Top Layer-No Net" (solid, remove dead copper, pour order 19): 2270,4465 2270,1425 2285,1410 2300,1425 6930,1425 6930,4460 6925,4465
AVSS on Top Layer "Top Layer-No Net" (solid, remove dead copper, pour order 17): 5810,3610 5805,3605 5805,2685 6929.59,2685 6935,2690.41 6920,2705.41 6920,3610
no net on Top Layer "Top Layer-No Net 1" (solid, pour order 2): 5795,2850
GND on Bottom Layer "Top Layer-No Net" (solid, remove dead copper, pour order 23): 2275,4465 6930,4465 6925,4460 6925,1415 2290,1415 2270,1435
AVSS on Bottom Layer "Top Layer-No Net" (solid, remove dead copper, pour order 21): 5760,3605.71 5765.35,3600.71 6952.55,3600.71 6952.55,2705.71 6936.51,2690.71 6931.16,2685.71 5770.7,2685.71

## Keep-outs
Keep-Out Layer:
  lines w10: 2255.92,1407.95 6935.92,1407.95 6935.92,4479.95 2257.92,4479.95 2257.92,1409.95

## Silkscreen, mask and mechanical layers (free items; w line width, h text height)
Top Overlay:
  drawing of 7456 lines, arcs and shapes, not listed
  text "POWER" at 2975,4355 h100
  text "Uart/IIC/SPI" at 6035,4355 h100
  text "LCD顯示屏" at 5535,4341.12 h100
  text "UART" at 6309.81,4235 h50
  text "IIC" at 6511,4235 h50
  text "SPI" at 6685,4235 h50
  text "GND" at 6660,4155 h60
  text "COM0" at 3375.2,4130 h50
  text "SEG0" at 3780,4125 h50
  text "15" at 5305,4125 h50
  text "20" at 5815,4125 h50
  text "3" at 3715,4124.4 h50
  text "5" at 4320,4124.4 h50
  text "10" at 4820,4124.4 h50
  text "RX" at 6320,4055 h60
  text "SDA" at 6485,4055 h60
  text "SDI" at 6670,4055 h60
  text "Vbat" at 3178.03,4030 h50
  text "TX" at 6325,3955 h60
  text "SDO" at 6660,3955 h60
  text "SCSB" at 6635,3855 h60
  text "3V" at 3201.4,3780 h50
  text "SCK" at 6655,3760 h60
  text "SCL" at 6480,3755 h60
  text "VDD" at 6660,3650 h60
  text "HT7530" at 2831,3629.11 h80
  text "傳感器" at 5815,3485 h100
  text "BMHB6003_V1.2" at 4665,3235.4 h47
  text "VTP-" at 6655,3200 h60
  text "2019/01/25" at 4895,3150 h80
  text "NTC+" at 6655,3095 h60
  text "2752" at 3880,3035 h60
  text "BEEP" at 3300,3025 h100
  text "VTP+" at 6655,2995 h60
  text "VDD" at 2445,2908.19 h60
  text "NTC-" at 6660,2895 h60
  text "2762" at 3875,2875 h60
  text "OCDSCK" at 2400,2805 h60
  text "OCDSDA" at 2395,2710 h60
  text "GND" at 2445,2610 h60
  text "藍牙" at 5815,2555 h100
  text "BH67F2752/62" at 4375,2485 h90
  text "VOREG" at 4945,2375 h38
  text "E_LINK" at 2285,2345 h100
  text "VDD" at 4440,2265 h38
  text "VCM" at 4935,2215 h38
  text "按鍵" at 2280,2190 h100
  text "GND" at 4439.2,2140 h38

## Text inside footprints (layer, text, board x,y; h text height)
H3: Top Overlay "9" at 5370,1770.2 h50; Top Overlay "10" at 5360,1480 h50; Top Overlay "2" at 4975,1475 h50; Top Overlay "1" at 4985,1770 h50; Top Overlay "15" at 5655,1764.05 h50; Top Overlay "16" at 5660,1480 h50
H4: Top Overlay "32" at 4962,3750 h38; Top Overlay "31" at 4962,4030 h38; Top Overlay "17" at 5652,4025 h38; Top Overlay "18" at 5672,3750 h38; Top Overlay "26" at 5257,3755 h38; Top Overlay "25" at 5257,4035 h38
H5: Top Overlay "41" at 4025,4035 h38; Top Overlay "42" at 4000,3755 h38; Top Overlay "34" at 4405,3745 h38; Top Overlay "33" at 4425,4030 h38; Top Overlay "47" at 3700,4035 h38; Top Overlay "48" at 3700,3755 h38
H6: Top Overlay "57" at 4121.38,1480 h38; Top Overlay "58" at 4106.38,1767 h38; Top Overlay "50" at 3711.38,1772 h38; Top Overlay "49" at 3701.38,1482 h38; Top Overlay "64" at 4406.38,1767 h38; Top Overlay "63" at 4421.38,1482 h38